# Altium PCB PCB.PcbDoc
Units mil, origin at the board's own origin, x right, y up, seen from the top; angles counter-clockwise.
Board outline 3149.61 x 860.63 mil, 4 copper layers (Top Layer 1, Top Layer, Bottom Layer, Bottom Layer 1), stack 33.356 mil thick; 3 components, 22 nets, 98 pads, 84 vias.
Unrouted connection lines stored in the file: 21.
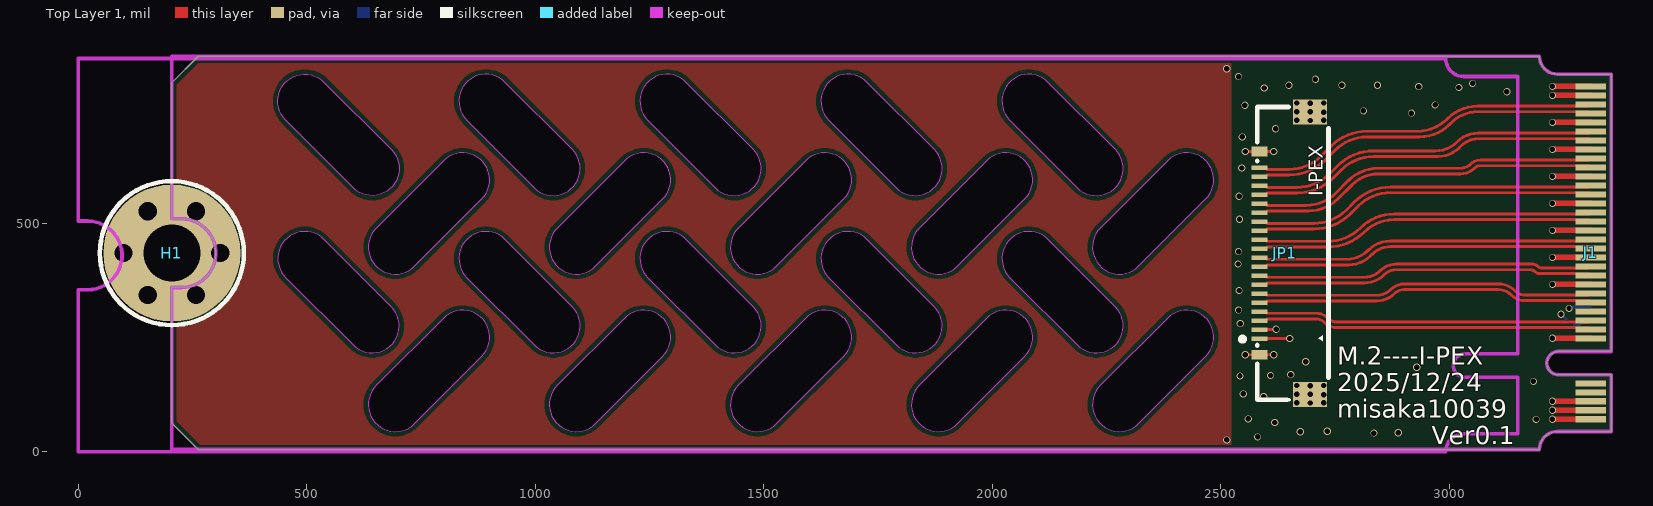
[diagram p0: Top Layer 1 view]
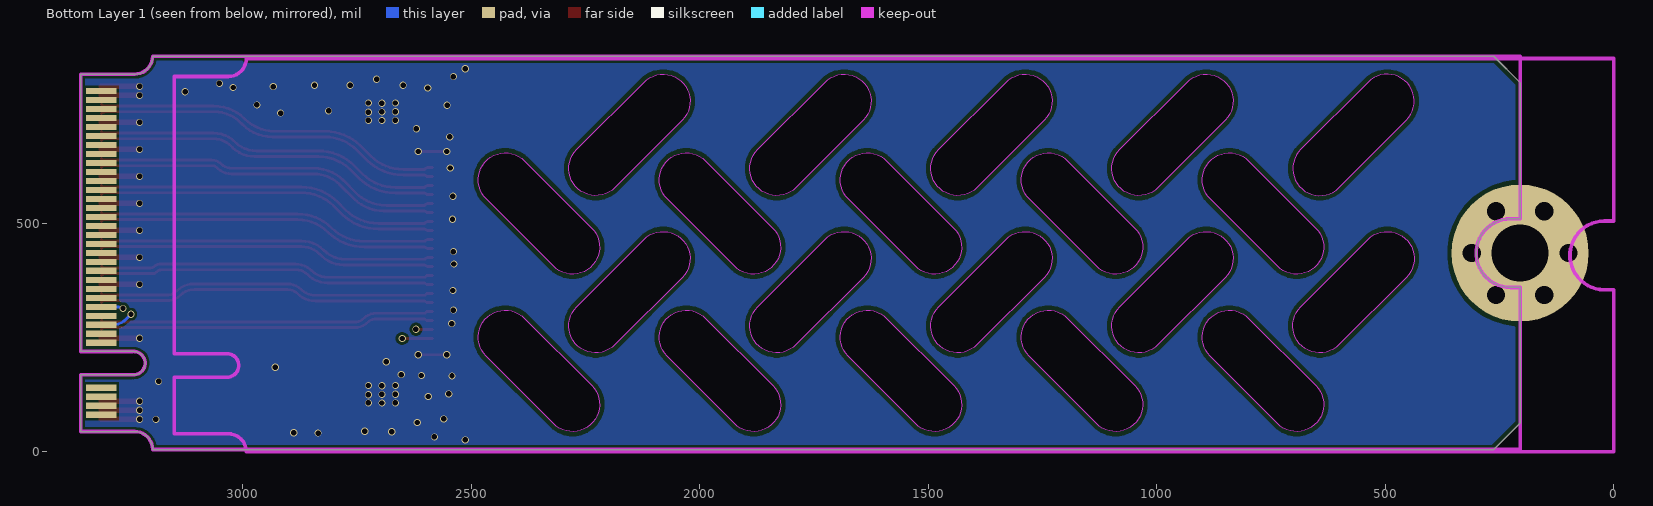
[diagram p1: Bottom Layer 1 view, seen from below]
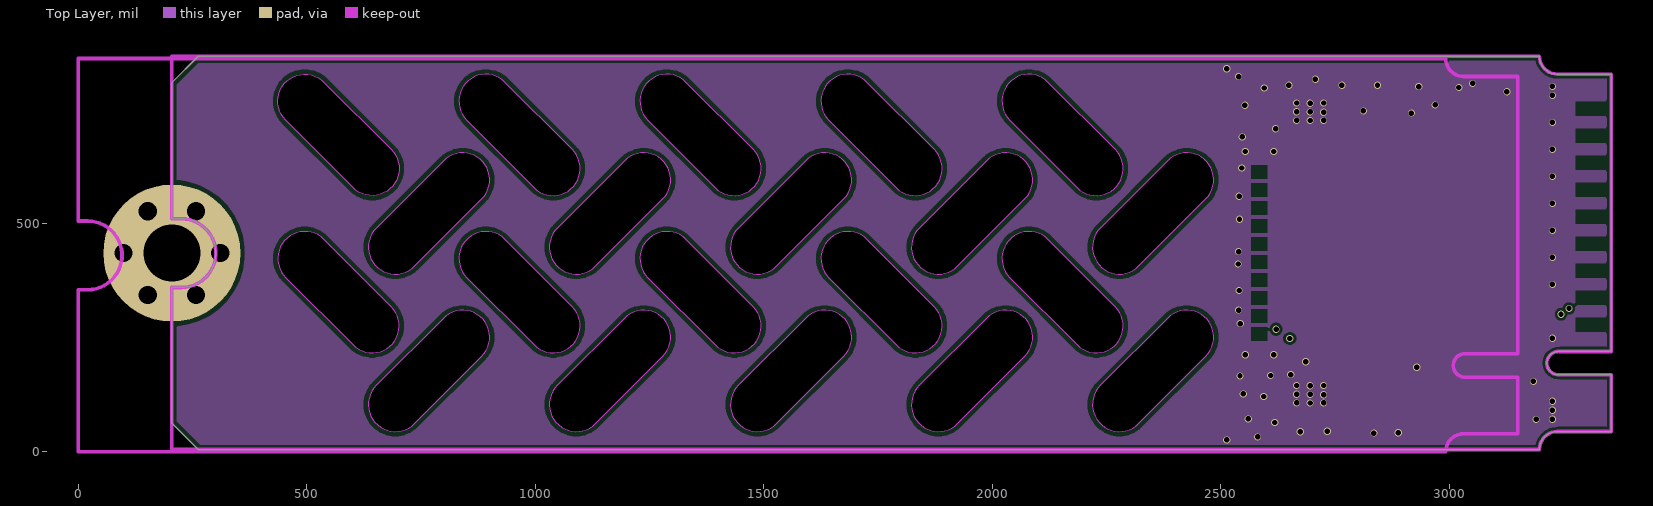
[diagram p2: Top Layer]
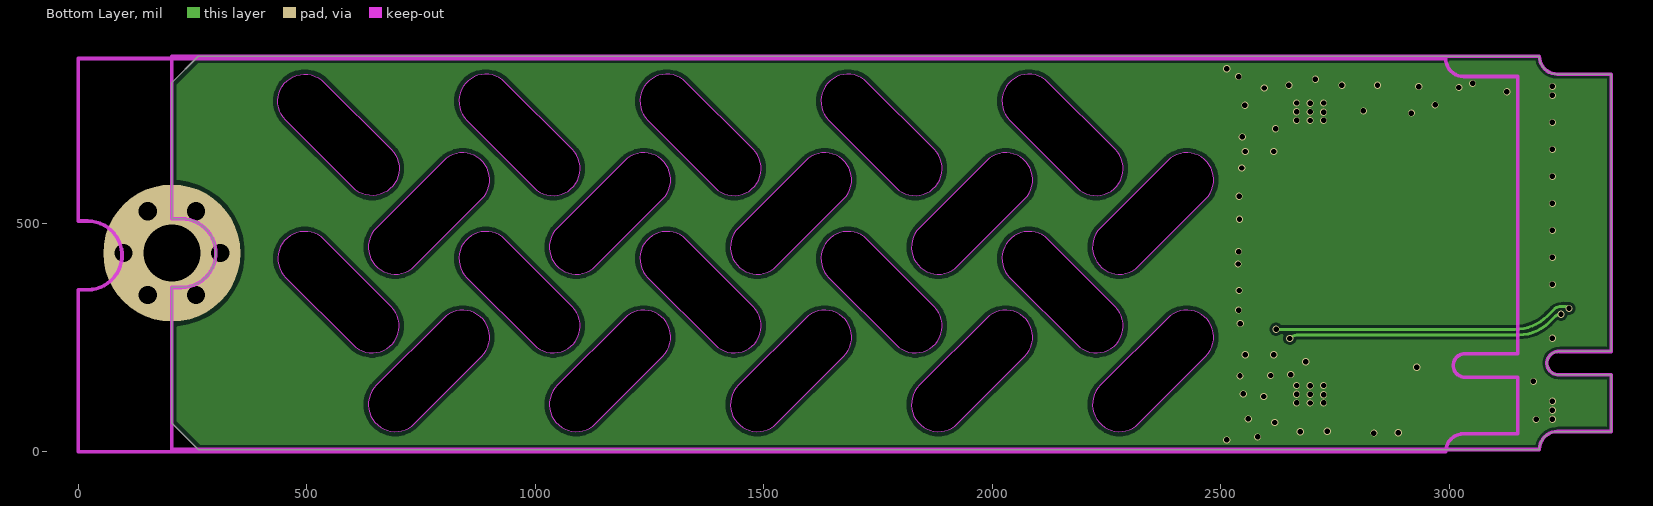
[diagram p3: Bottom Layer]

## Layer stack, top to bottom
Top Solder: solder mask 0.4, Solder Resist, Dk 3.5
Top Layer 1: signal copper 1.378
Dielectric 2: prepreg 2.8, PP-006, Dk 4.1
Top Layer: signal copper 0.689
Dielectric 1: dielectric 23.622, FR-4, Dk 4.8
Bottom Layer: signal copper 0.689
Dielectric 3: prepreg 2.8, PP-006, Dk 4.1
Bottom Layer 1: signal copper 1.378
Bottom Solder: solder mask 0.4, Solder Resist, Dk 3.5

## Board outline
205,359.57 225.9,359.57 ccw(c225.9,434.73) 225.9,509.9 225.9,509.94 205,509.94 205.01,509.91 205.01,807.73 262.91,865.63 3197.13,865.63 ccw(c3236.5,865.63) 3236.5,826.26 3354.61,826.25 3354.61,219.56 3240.44,219.56 ccw(c3239.21,193.97) 3240.43,168.38 3354.61,168.38 3354.61,44.37 3236.5,44.37 ccw(c3236.5,5) 3197.13,5 262.57,5 205.01,62.57
cut-out: 2038.42,725.45 2185.82,578.04 ccw(c2227.58,619.8) 2269.34,661.56 2121.94,808.96 ccw(c2080.18,767.2)
cut-out: 1642.36,725.45 1789.76,578.04 ccw(c1831.52,619.8) 1873.28,661.56 1725.87,808.96 ccw(c1684.12,767.2)
cut-out: 1246.29,725.45 1393.7,578.04 ccw(c1435.45,619.8) 1477.21,661.56 1329.81,808.96 ccw(c1288.05,767.2)
cut-out: 850.23,725.45 997.63,578.04 ccw(c1039.39,619.8) 1081.15,661.56 933.75,808.96 ccw(c891.99,767.2)
cut-out: 601.57,578.04 454.17,725.45 cw(c495.93,767.2) 537.68,808.96 685.09,661.56 cw(c643.33,619.8)
cut-out: 652.15,489.44 ccw(c693.91,447.68) 735.67,405.92 883.07,553.32 ccw(c841.31,595.08) 799.56,636.84
cut-out: 1048.22,489.44 ccw(c1089.98,447.68) 1131.73,405.92 1279.14,553.32 ccw(c1237.38,595.08) 1195.62,636.84
cut-out: 1444.28,489.44 ccw(c1486.04,447.68) 1527.8,405.92 1675.2,553.32 ccw(c1633.44,595.08) 1591.68,636.84
cut-out: 1840.34,489.44 ccw(c1882.1,447.68) 1923.86,405.92 2071.26,553.32 ccw(c2029.5,595.08) 1987.75,636.84
cut-out: 2236.41,489.44 ccw(c2278.16,447.68) 2319.92,405.92 2467.32,553.32 ccw(c2425.57,595.08) 2383.81,636.84
cut-out: 2038.42,381.19 2185.82,233.79 ccw(c2227.58,275.55) 2269.34,317.31 2121.94,464.71 ccw(c2080.18,422.95)
cut-out: 1642.36,381.19 1789.76,233.79 ccw(c1831.52,275.55) 1873.28,317.31 1725.87,464.71 ccw(c1684.12,422.95)
cut-out: 1246.29,381.19 1393.7,233.79 ccw(c1435.45,275.55) 1477.21,317.31 1329.81,464.71 ccw(c1288.05,422.95)
cut-out: 850.23,381.19 997.63,233.79 ccw(c1039.39,275.55) 1081.15,317.31 933.75,464.71 ccw(c891.99,422.95)
cut-out: 454.17,381.19 601.57,233.79 ccw(c643.33,275.55) 685.09,317.31 537.68,464.71 ccw(c495.93,422.95)
cut-out: 652.15,145.18 ccw(c693.91,103.43) 735.67,61.67 883.07,209.07 ccw(c841.31,250.83) 799.56,292.59
cut-out: 1048.22,145.18 ccw(c1089.98,103.43) 1131.73,61.67 1279.14,209.07 ccw(c1237.38,250.83) 1195.62,292.59
cut-out: 1444.28,145.18 ccw(c1486.04,103.43) 1527.8,61.67 1675.2,209.07 ccw(c1633.44,250.83) 1591.68,292.59
cut-out: 1840.34,145.18 ccw(c1882.1,103.43) 1923.86,61.67 2071.26,209.07 ccw(c2029.5,250.83) 1987.75,292.59
cut-out: 2236.41,145.18 ccw(c2278.16,103.43) 2319.92,61.67 2467.32,209.07 ccw(c2425.57,250.83) 2383.81,292.59

## Design rules (kind name [scope] priority, off if disabled: settings)
BoardOutlineClearance [All] p1: gap=10 ignorepadtopadclearanceinfootprint=FALSE except(0: Arc-SplitContinuation Track-SplitContinuation SMDPad-SplitContinuation THPad-SplitContinuation Via-SplitContinuation Fill-SplitContinuation Poly-SplitContinuation Region-SplitContinuation Text-SplitContinuation)
Clearance [All] p1: gap=6 ignorepadtopadclearanceinfootprint=FALSE
DiffPairsRouting "Schematic Differential Pairs Routing" [InNetClass('PICE')] p1: maxlimit=10 minlimit=6 mostfreqgap=6 toplayer_minwidth=6.3 toplayer_maxwidth=15 toplayer_prefwidth=6.3 midlayer1_minwidth=6.3 midlayer1_maxwidth=15 midlayer1_prefwidth=6.3 midlayer2_minwidth=6.3 midlayer2_maxwidth=15 midlayer2_prefwidth=6.3 bottomlayer_minwidth=6.3 bottomlayer_maxwidth=15 bottomlayer_prefwidth=6.3 maxuncoupledlength=500
DiffPairsRouting [All] p2: maxlimit=10 minlimit=4 mostfreqgap=10 toplayer_minwidth=4 toplayer_maxwidth=15 toplayer_prefwidth=15 midlayer1_minwidth=4 midlayer1_maxwidth=15 midlayer1_prefwidth=15 midlayer2_minwidth=4 midlayer2_maxwidth=15 midlayer2_prefwidth=15 bottomlayer_minwidth=4 bottomlayer_maxwidth=15 bottomlayer_prefwidth=15 maxuncoupledlength=500
PolygonConnect [All] p1: thpad.connectstyle=Relief thpad.reliefconductorwidth=10 thpad.reliefentries=4 thpad.polygonreliefangle="90 Angle" thpad.airgapwidth=10 smdpad.connectstyle=Relief smdpad.reliefconductorwidth=10 smdpad.reliefentries=4 smdpad.polygonreliefangle="90 Angle" smdpad.airgapwidth=10 via.connectstyle=Direct via.reliefconductorwidth=10 via.reliefentries=4 via.polygonreliefangle="90 Angle" via.airgapwidth=10
RoutingVias [All] p1: holewidth=11.81 width=0 viastyle="Through Hole" minholewidth=11.81 minwidth=15.75 maxholewidth=28 maxwidth=50
SolderMaskExpansion [ISVIA] p1: expansion=4 istentingtop=TRUE
Width [All] p1: maxlimit=400 minlimit=4 preferedwidth=10
29 further rules are at their usual default settings.

## Classes and differential pairs
net class PICE: REFCLK_N REFCLK_P RX0_N RX0_P RX1_N RX1_P RX2_N RX2_P RX3_N RX3_P TX0_N TX0_P TX1_N TX1_P TX2_N TX2_P TX3_N TX3_P
differential pair TX3: +TX3_P -TX3_N
differential pair TX2: +TX2_P -TX2_N
differential pair TX1: +TX1_P -TX1_N
differential pair TX0: +TX0_P -TX0_N
differential pair RX3: +RX3_P -RX3_N
differential pair RX2: +RX2_P -RX2_N
differential pair RX1: +RX1_P -RX1_N
differential pair RX0: +RX0_P -RX0_N
differential pair REFCLK: +REFCLK_P -REFCLK_N

## Components (designator, comment, footprint, x,y, rotation, side; value= is the part's Value field where it differs from the comment)
H1 "Hole" M3x4+6_N 205,434.75 r0 top
J1 "M.2接口" "M.2 M KEY PcbEdge" 3354.61,435.31 r0 top
JP1 "FPC1.0-24P" CONN-SMD_20P-P0.50_I-PEX_20455-020E-02 2640,434.73 r90 top

## Footprints (in the part's own frame and the unit in brackets; to place one, negate y for a bottom-side part, rotate by r counter-clockwise, add the part's x,y. Pads: shape width x height; smd on the part's side, far side on the other; paste and mask are expansions set on the pad)
CONN-SMD_20P-P0.50_I-PEX_20455-020E-02 [mm]
  rect 0.25x0.9 smd: 1(-4.75,1.41) 2(-4.25,1.41) 3(-3.75,1.41) 4(-3.25,1.41) 5(-2.75,1.41) 6(-2.25,1.41) 7(-1.75,1.41) 8(-1.25,1.41) 9(-0.75,1.41) 10(-0.25,1.41) 11(0.25,1.41) 12(0.75,1.41) 13(1.25,1.41) 14(1.75,1.41) 15(2.25,1.41) 16(2.75,1.41) 17(3.25,1.41) 18(3.75,1.41) 19(4.25,1.41) 20(4.75,1.41)
  rect 0.55x0.9 smd: 21(5.65,1.41) 23(-5.65,1.41)
  rect 1.4x1.9 smd: 22(7.85,-1.41) 24(-7.85,-1.41)
  silkscreen extent -8.14,-2.43 8.12,2.48, body extent -8.13,-2.4 8.13,1.55, height 1.01
M3x4+6_N [mil] "M3铜柱，长：4mm，螺纹长：6mm"
  round 40 hole 40: 1(-106,0) 1(-53,-91.8) 1(-53,91.8) 1(53,-91.8) 1(53,91.8) 1(106,0)
  round 300 hole 125: 1(0,0)
  silkscreen extent -157,-157 157,157, body extent -106,-93 106,93, height 159
"M.2 M KEY PcbEdge" [mm] "m.2 mkey金手指"
  rect 1.7x0.34 smd paste+0 mask+0.102: 1(-1.15,9.25) 3(-1.15,8.75) 5(-1.15,8.249) 7(-1.15,7.749) 9(-1.15,7.249) 11(-1.15,6.749) 13(-1.15,6.249) 15(-1.15,5.749) 17(-1.15,5.249) 19(-1.15,4.749) 21(-1.15,4.249) 23(-1.15,3.749) 25(-1.15,3.249) 27(-1.15,2.749) 29(-1.15,2.249) 31(-1.15,1.749) 33(-1.15,1.249) 35(-1.15,0.749) 37(-1.15,0.249) 39(-1.15,-0.251) 41(-1.15,-0.751) 43(-1.15,-1.251) 45(-1.15,-1.751) 47(-1.15,-2.251) 49(-1.15,-2.751) 51(-1.15,-3.251) 53(-1.15,-3.751) 55(-1.15,-4.251) 57(-1.15,-4.751) 67(-1.15,-7.251) 69(-1.15,-7.751) 71(-1.15,-8.251) 73(-1.15,-8.751) 75(-1.15,-9.251)
  rect 1.7x0.34 smd far side paste+0 mask+0.102: 2(-1.15,9) 4(-1.15,8.501) 6(-1.15,8.001) 8(-1.15,7.501) 10(-1.15,7.001) 12(-1.15,6.501) 14(-1.15,6.001) 16(-1.15,5.501) 18(-1.15,5.001) 20(-1.151,4.499) 22(-1.15,4.001) 24(-1.15,3.501) 26(-1.15,3.001) 28(-1.15,2.501) 30(-1.15,2.001) 32(-1.15,1.501) 34(-1.15,1.001) 36(-1.15,0.501) 38(-1.15,0.001) 40(-1.15,-0.499) 42(-1.151,-0.998) 44(-1.15,-1.499) 46(-1.15,-1.999) 48(-1.15,-2.499) 50(-1.15,-2.999) 52(-1.15,-3.499) 54(-1.15,-3.999) 56(-1.15,-4.499) 58(-1.15,-4.999) 68(-1.15,-7.499) 70(-1.15,-7.999) 72(-1.15,-8.499) 74(-1.15,-8.999)
  Keep-Out Layer lines w0.2: -80,-1.924 -79.469,-1.924 ccw(c-79.469,-0.015) -79.469,1.894 ; -80,-1.923 -80,-10.93 -4,-10.93 cw(c-3,-10.93) -3,-9.93 0,-9.93 0,-6.78 -2.9,-6.78 cw(c-2.931,-6.13) -2.9,-5.48 0,-5.48 0,9.93 -3,9.93 cw(c-3,10.93) -4,10.93 -80,10.93 ; -80,1.895 -80,10.93 ; -80,1.895 -79.469,1.895

## Part data
H1: "铜柱孔", BOM名称=铜柱孔, 学习资源=www.ooocke.com, 版权归属=源创客
J1: Package=None, Availability=Unavailable, MF="Amphenol ICC (FCI)", MP=MDT420M01002, Price=None
JP1: library part FPC-24P, "FPC连接器", BOM名称=FPC连接器, 学习资源=www.ooocke.com, 版权归属=源创客

## Via types
v1: diameter 15.75, hole 11.81, Top Layer 1 to Bottom Layer 1, tented both sides, 84 vias

## Nets (pads, with @x,y where several pads share a name; then routed paths per layer and width w, separated by ;. In a path a pad name is that pad's centre, name@x,y a point inside that pad or via, vN(x,y) a via of type N, cw(c..) or ccw(c..) an arc to the next point about the centre after c; other vN are vias at no path point)
GND: H1.1@205,434.75 J1.1 J1.3 J1.9 J1.15 J1.21 J1.27 J1.33 J1.39 J1.45 J1.51 J1.57 J1.71 J1.73 J1.75 JP1.21 JP1.22 JP1.23 JP1.24 | length 1213.9
  Top Layer 1 w6.3: v1(2553.52,212.29) JP1.23 v1(2615.71,212.29) ; v1(2553.52,657.17) JP1.21 v1(2615.71,657.17)
  Top Layer 1 w11.81: v1(3225.52,71.11) J1.75 ; v1(3225.52,90.79) J1.73 ; v1(3225.52,110.48) J1.71 ; v1(3225.52,248.27) J1.57 ; v1(3225.52,366.38) J1.45 ; v1(3225.52,425.44) J1.39 ; v1(3225.52,484.49) J1.33 ; v1(3225.52,543.55) J1.27 ; v1(3225.52,602.6) J1.21 ; v1(3225.52,661.66) J1.15 ; v1(3225.52,720.71) J1.9 ; v1(3225.52,779.78) J1.3 ; v1(3225.53,799.48) J1.1
  other v1: 2513,26 2580.54,32.51 2835,41 2888.16,41.83 2674,44 2733,45 2618,64 3190,71 2560,72 2666,107 2695.51,106.68 2725,107 2594,121 2725,125 2666,126 2695.51,125.68 2549.09,126.65 2666,145 2695.51,144.68 2725,145 3184,154 2542,166 2609,167 2653,169 2929,185 2686,197 2542.72,280.4 2539,310 258,342.95 2540,353 2538,411 311,434.75 2539,438 2541,509 258,526.55 2540,559 2546,621 2547,689 2620,707 2666,725.11 2695.51,724.79 2725,725.11 2917,741 2725,743.11 2666,744.11 2695.51,743.79 2812,746 2552.81,758.3 2969,759 2666,763.11 2695.51,762.79 2725,763.11 3126,788 2595,796 3021,797 2933,799 2649,802 2765,802 2843,802 3051,806 2707,815 2539,821 2513,838
PERST#: J1.50 JP1.2 | length 733.2
  Top Layer 1 w6.3: JP1.2 2584.8,267.7 2620.7,267.7 v1(2621,268)
  Bottom Layer w6.3: v1(2621,268) 3143.96,268 ccw(c3143.96,368) 3214.67,297.29 3228.85,311.46 cw(c3245.25,295.06) 3245.25,318.26 3250.95,318.26 cw(c3250.95,302.64) 3255.55,317.56 cw(c3250.95,302.64) v1(3261.99,313.69)
  Bottom Layer 1 w6.3: 3270.56,317.23 J1.50
REFCLK_N: J1.53 JP1.4 | length 733
  Top Layer 1 w6.3: JP1.4 2597.3,306.78 2600.99,303.09 2708.33,303.09 cw(c2708.33,264.53) 2735.6,291.79 ccw(c2754.52,310.72) 2754.52,283.95 3275.32,283.95 3275.47,284.1 3305.78,284.1 J1.53
REFCLK_P: J1.55 JP1.3 | length 733
  Top Layer 1 w6.3: JP1.3 2597.3,287.1 2600.99,290.79 2708.22,290.79 cw(c2708.22,264.27) 2726.97,283.02 ccw(c2754.42,310.47) 2754.42,271.65 3275.32,271.65 3275.47,271.51 3305.78,271.51 J1.55
RX0_N: J1.41 JP1.8 | length 737.3
  Top Layer 1 w6.3: JP1.8 2597.3,385.52 2600.99,381.83 2814.08,381.83 ccw(c2814.08,430.95) 2848.8,396.19 ; 2848.84,396.24 cw(c2883.56,361.48) 2883.56,410.6 3182.59,410.6 cw(c3182.59,396.03) 3192.9,406.33 ccw(c3203.21,416.64) 3203.21,402.06 3275.32,402.06 3275.47,402.21 3300.77,402.21 ccw(c3300.77,414.31) J1.41
RX0_P: J1.43 JP1.7 | length 737.3
  Top Layer 1 w6.3: JP1.7 2597.3,365.84 2600.99,369.53 2814.19,369.53 ccw(c2814.19,430.68) 2857.44,387.44 cw(c2883.67,361.21) 2883.67,398.3 3177.5,398.3 cw(c3177.5,383.73) 3187.8,394.03 ccw(c3198.11,404.34) 3198.11,389.76 3275.32,389.76 3275.47,389.62 3300.77,389.62 cw(c3300.77,377.52) J1.43
RX1_N: J1.29 JP1.12 | length 748.5
  Top Layer 1 w6.3: JP1.12 2594.69,464.26 cw(c2594.69,457.96) JP1.12@2599.13,462.42 ; J1.29 3305.78,520.32 3275.47,520.32 3275.32,520.17 2878.65,520.17 ccw(c2878.65,416.66) 2805.47,489.87 cw(c2734.75,560.57) 2734.75,460.57 2603.59,460.57 ; JP1.12@2599.15,462.4 ccw(c2603.59,466.87) 2603.59,460.57 ; JP1.12@2599.15,462.4 2600.99,460.57 2603.59,460.57
RX1_P: J1.31 JP1.11 | length 748.5
  Top Layer 1 w6.3: JP1.11 2594.69,444.58 ccw(c2594.69,450.88) JP1.11@2599.13,446.41 ; J1.31 3305.78,507.73 3275.47,507.73 3275.32,507.87 2878.77,507.87 ccw(c2878.77,416.39) 2814.11,481.11 cw(c2734.87,560.29) 2734.87,448.27 2603.59,448.27 ; 2603.59,448.27 ccw(c2603.59,441.97) 2599.15,446.43 2600.99,448.27 2603.59,448.27
RX2_N: J1.17 JP1.16 | length 763
  Top Layer 1 w6.3: JP1.16 2594.69,543 cw(c2594.69,536.7) JP1.16@2599.13,541.16 ; 2778.9,593.29 2751.9,566.3 cw(c2686.74,631.47) 2686.74,539.31 2603.59,539.31 ; 2778.93,593.32 cw(c2844.1,528.09) 2844.1,620.3 3024.58,620.3 ccw(c3024.58,651) 3046.28,629.28 cw(c3068,607.58) 3068,638.28 3275.32,638.28 3275.47,638.43 3305.78,638.43 J1.17 ; JP1.16@2599.15,541.14 ccw(c2603.59,545.61) 2603.59,539.31 ; JP1.16@2599.15,541.14 2600.99,539.31 2603.59,539.31
RX2_P: J1.19 JP1.15 | length 763.5
  Top Layer 1 w6.3: JP1.15 2594.69,523.32 ccw(c2594.69,529.62) JP1.15@2599.13,525.15 ; J1.19 3305.78,625.84 3275.47,625.84 3275.32,625.98 3068.09,625.98 ccw(c3068.09,607.37) 3054.94,620.54 cw(c3024.67,650.78) 3024.67,608 2844.23,608 ccw(c2844.23,527.77) 2787.52,584.52 2757,554 cw(c2691.83,619.17) 2691.83,527.01 2603.59,527.01 ; JP1.15@2599.15,525.17 cw(c2603.59,520.71) 2603.59,527.01 ; JP1.15@2599.15,525.17 2600.99,527.01 2603.59,527.01
RX3_N: J1.7 JP1.19 | length 772.6
  Top Layer 1 w6.3: JP1.19 2594.69,602.06 ccw(c2594.69,608.36) JP1.19@2599.13,603.89 ; J1.7 ccw(c3300.77,731.85) 3300.77,743.95 3275.47,743.95 3275.32,744.09 3062.51,744.09 ccw(c3062.51,662.34) 3004.7,720.15 3001.1,716.55 cw(c2934.6,783.05) 3001.06,716.51 cw(c2934.6,783.05) 2934.6,689 2820.42,689 ccw(c2820.42,589) 2749.71,659.71 2728.56,638.56 cw(c2649.35,717.77) 2649.35,605.75 2603.59,605.75 ; JP1.19@2599.15,603.91 cw(c2603.59,599.45) 2603.59,605.75 ; JP1.19@2599.15,603.91 2600.99,605.75 2603.59,605.75
RX3_P: J1.5 JP1.20 | length 772.1
  Top Layer 1 w6.3: JP1.20 2594.69,621.74 cw(c2594.69,615.44) JP1.20@2599.13,619.9 ; 2996.01,728.85 cw(c2929.5,795.35) 2995.97,728.81 cw(c2929.5,795.35) 2929.5,701.3 2820.31,701.3 ccw(c2820.31,589.28) 2741.11,668.51 2719.94,647.34 cw(c2649.23,718.05) 2649.23,618.05 2603.59,618.05 ; 2996.03,728.87 cw(c3062.48,662.43) 2996.09,728.94 cw(c3062.48,662.43) 3062.48,756.39 3275.32,756.39 3275.47,756.54 3300.77,756.54 ccw(c3300.77,768.64) J1.5 ; JP1.20@2599.15,619.88 ccw(c2603.59,624.35) 2603.59,618.05 ; JP1.20@2599.15,619.88 2600.99,618.05 2603.59,618.05
TX0_N: J1.47 JP1.6 | length 741
  Top Layer 1 w6.3: JP1.6 2597.3,346.15 2600.99,342.46 2841.5,342.46 ccw(c2841.5,384.87) 2871.48,354.88 cw(c2901.47,324.89) 2901.47,367.3 3106.87,367.3 cw(c3106.87,313.64) 3144.8,351.6 ccw(c3165.51,372.28) 3165.51,343.01 3275.32,343.01 3275.47,343.16 3305.78,343.16 J1.47
TX0_P: J1.49 JP1.5 | length 741
  Top Layer 1 w6.3: JP1.5 2597.3,326.47 2600.99,330.16 2841.53,330.16 ccw(c2841.53,384.78) 2880.16,346.16 cw(c2901.51,324.81) 2901.51,355 3106.82,355 cw(c3106.82,313.53) 3136.15,342.85 ; 3136.18,342.82 ccw(c3165.46,372.15) 3165.46,330.71 3275.32,330.71 3275.47,330.56 3305.78,330.56 J1.49
TX1_N: J1.35 JP1.10 | length 743.2
  Top Layer 1 w6.3: JP1.10 2594.69,424.89 cw(c2594.69,418.59) JP1.10@2599.13,423.05 ; 2822.74,441.14 cw(c2774.57,489.35) 2774.57,421.2 2603.59,421.2 ; 2822.79,441.18 cw(c2870.92,393.05) 2822.84,441.23 cw(c2870.92,393.05) 2870.92,461.12 3275.32,461.12 3275.47,461.27 3305.78,461.27 J1.35 ; JP1.10@2599.15,423.03 ccw(c2603.59,427.5) 2603.59,421.2 ; JP1.10@2599.15,423.03 2600.99,421.2 2603.59,421.2
TX1_P: J1.37 JP1.9 | length 743.8
  Top Layer 1 w6.3: JP1.9 2594.69,405.21 ccw(c2594.69,411.51) JP1.9@2599.13,407.04 ; J1.37 3305.78,448.67 3275.47,448.67 3275.32,448.82 2870.95,448.82 ccw(c2870.95,392.97) 2831.46,432.46 2827.86,428.86 cw(c2779.67,477.05) 2779.67,408.9 2603.59,408.9 ; JP1.9@2599.15,407.06 cw(c2603.59,402.6) 2603.59,408.9 ; JP1.9@2599.15,407.06 2600.99,408.9 2603.59,408.9
TX2_N: J1.23 JP1.14 | length 756.3
  Top Layer 1 w6.3: JP1.14 2594.69,503.63 cw(c2594.69,497.33) JP1.14@2599.13,501.79 ; 2792.02,546.42 2774.83,529.23 cw(c2704.12,599.94) 2704.12,499.94 2603.59,499.94 ; 2792.04,546.44 cw(c2871.24,467.21) 2871.24,579.23 3275.32,579.23 3275.47,579.38 3305.78,579.38 J1.23 ; 2603.59,499.94 cw(c2603.59,506.24) 2599.15,501.77 2600.99,499.94 2603.59,499.94
TX2_P: J1.25 JP1.13 | length 756.3
  Top Layer 1 w6.3: JP1.13 2594.69,483.95 ccw(c2594.69,490.25) JP1.13@2599.13,485.78 ; J1.25 3305.78,566.78 3275.47,566.78 3275.32,566.93 2871.35,566.93 ccw(c2871.35,466.93) 2800.64,537.64 2783.45,520.45 cw(c2704.24,599.66) 2704.24,487.64 2603.59,487.64 ; JP1.13@2599.15,485.8 cw(c2603.59,481.34) 2603.59,487.64 ; JP1.13@2599.15,485.8 2600.99,487.64 2603.59,487.64
TX3_N: J1.11 JP1.18 | length 766.8
  Top Layer 1 w6.3: JP1.18 2594.69,582.37 cw(c2594.69,576.07) JP1.18@2599.13,580.53 ; 3016.82,677.82 cw(c2969.7,724.94) 2969.7,658.3 2834.31,658.3 ccw(c2834.31,546.28) 2755.11,625.51 2737.57,607.97 cw(c2666.86,678.68) 2666.86,578.68 2603.59,578.68 ; 3016.84,677.84 cw(c3063.91,630.78) 3016.89,677.89 cw(c3063.91,630.78) 3063.91,697.34 3275.32,697.34 3275.47,697.49 3305.78,697.49 J1.11 ; 2603.59,578.68 cw(c2603.59,584.98) 2599.15,580.51 2600.99,578.68 2603.59,578.68
TX3_P: J1.13 JP1.17 | length 767.4
  Top Layer 1 w6.3: JP1.17 2594.69,562.69 ccw(c2594.69,568.99) JP1.17@2599.13,564.52 ; J1.13 3305.78,684.89 3275.47,684.89 3275.32,685.04 3063.94,685.04 ccw(c3063.94,630.7) 3025.52,669.12 3021.91,665.52 cw(c2974.79,712.64) 2974.79,646 2834.42,646 ccw(c2834.42,546) 2763.71,616.71 2746.19,599.19 cw(c2666.98,678.4) 2666.98,566.38 2603.59,566.38 ; 2603.59,566.38 ccw(c2603.59,560.08) 2599.15,564.54 2600.99,566.38 2603.59,566.38
VCC3.3V: J1.2 J1.4 J1.12 J1.14 J1.16 J1.18 J1.70 J1.72 J1.74
WAKE#: J1.54 JP1.1 | length 724
  Top Layer 1 w6.3: JP1.1 2584.64,247.86 2650.86,247.86 v1(2651,248)
  Bottom Layer w6.3: v1(2651,248) cw(c2669.59,229.41) 2654.98,251.27 cw(c2669.59,229.41) 2669.59,255.7 3151.94,255.7 ccw(c3151.94,349.26) 3218.06,283.06 ccw(c3151.94,349.26) 3218.1,283.1 3230.07,295.07 ; 3230.08,295.08 cw(c3244.34,280.8) 3236.07,299.21 cw(c3244.34,280.8) v1(3244.34,300.98)
  Bottom Layer 1 w6.3: v1(3244.34,300.98) 3255.24,290.07 ccw(c3284.72,319.55) J1.54@3284.72,277.86
pads on no net: H1.1@99,434.75 H1.1@152,342.95 H1.1@152,526.55 H1.1@258,342.95 H1.1@258,526.55 H1.1@311,434.75 J1.6 J1.8 J1.10 J1.20 J1.22 J1.24 J1.26 J1.28 J1.30 J1.32 J1.34 J1.36 J1.38 J1.40 J1.42 J1.44 J1.46 J1.48 J1.52 J1.56 J1.58 J1.67 J1.68 J1.69

## Polygon pours and split planes (outlines as drawn)
GND on Top Layer "GND_L02_P000" (solid, remove dead copper, pour order 0): 205,359.57 225.9,359.57 ccw(c225.9,434.73) 225.9,509.9 225.9,509.94 205,509.94 205.01,509.91 205.01,807.73 262.91,865.63 3197.13,865.63 ccw(c3236.5,865.63) 3236.5,826.26 3354.61,826.25 3354.61,219.56 3240.44,219.56 ccw(c3239.21,193.97) 3240.43,168.38 3354.61,168.38 3354.61,44.37 3236.5,44.37 ccw(c3236.5,5) 3197.13,5 262.57,5 205.01,62.57
GND on Top Layer 1 "GND_L01_P003" (solid, remove dead copper, pour order 3): 205,359.57 225.9,359.57 ccw(c225.9,434.73) 225.9,509.9 225.9,509.94 205,509.94 205.01,509.91 205.01,807.73 262.91,865.63 3197.13,865.63 ccw(c3236.5,865.63) 3236.5,826.26 3354.61,826.25 3354.61,219.56 3240.44,219.56 ccw(c3239.21,193.97) 3240.43,168.38 3354.61,168.38 3354.61,44.37 3236.5,44.37 ccw(c3236.5,5) 3197.13,5 262.57,5 205.01,62.57
GND on Bottom Layer 1 "GND_L04_P001" (solid, remove dead copper, pour order 1): 205,359.57 225.9,359.57 ccw(c225.9,434.73) 225.9,509.9 225.9,509.94 205,509.94 205.01,509.91 205.01,807.73 262.91,865.63 3197.13,865.63 ccw(c3236.5,865.63) 3236.5,826.26 3354.61,826.25 3354.61,219.56 3240.44,219.56 ccw(c3239.21,193.97) 3240.43,168.38 3354.61,168.38 3354.61,44.37 3236.5,44.37 ccw(c3236.5,5) 3197.13,5 262.57,5 205.01,62.57
GND on Bottom Layer "GND_L03_P002" (solid, remove dead copper, pour order 2): 205,359.57 225.9,359.57 ccw(c225.9,434.73) 225.9,509.9 225.9,509.94 205,509.94 205.01,509.91 205.01,807.73 262.91,865.63 3197.13,865.63 ccw(c3236.5,865.63) 3236.5,826.26 3354.61,826.25 3354.61,219.56 3240.44,219.56 ccw(c3239.21,193.97) 3240.43,168.38 3354.61,168.38 3354.61,44.37 3236.5,44.37 ccw(c3236.5,5) 3197.13,5 262.57,5 205.01,62.57

## Keep-outs
Keep-Out Layer:
  lines w7.87: 0,354.57 20.9,354.57 ccw(c20.9,429.73) 20.9,504.9 ; 0.01,354.61 0.01,0.01 2992.13,0 cw(c3031.5,0) 3031.5,39.37 3149.61,39.37 3149.61,163.38 3035.44,163.38 cw(c3034.2,188.98) 3035.43,214.57 3149.61,214.56 3149.61,821.25 3031.5,821.25 cw(c3031.5,860.63) 2992.13,860.63 0,860.63 ; 0.01,504.91 0.01,860.61 ; 0,504.94 20.9,504.94

## Other copper
Top Layer 1:
  pour cut-out: 3360,865.63 2523,865.63 2523,5 3360,5
Top Layer:
  pour cut-out: 3342.74,294.34 3342.79,294.34 3342.79,261.27 3275.86,261.27 3275.86,294.34 3341.2,294.34
  pour cut-out: 3342.74,353.4 3342.79,353.4 3342.79,320.33 3275.86,320.33 3275.86,353.4 3341.2,353.4
  pour cut-out: 3342.74,412.45 3342.79,412.45 3342.79,379.38 3275.86,379.38 3275.86,412.45 3341.2,412.45
  pour cut-out: 3342.74,471.51 3342.79,471.51 3342.79,438.44 3275.86,438.44 3275.86,471.51 3341.2,471.51
  pour cut-out: 3342.74,530.56 3342.79,530.56 3342.79,497.49 3275.86,497.49 3275.86,530.56 3341.2,530.56
  pour cut-out: 3342.74,589.62 3342.79,589.62 3342.79,556.55 3275.86,556.55 3275.86,589.62 3341.2,589.62
  pour cut-out: 3342.74,648.67 3342.79,648.67 3342.79,615.6 3275.86,615.6 3275.86,648.67 3341.2,648.67
  pour cut-out: 3342.74,707.73 3342.79,707.73 3342.79,674.66 3275.86,674.66 3275.86,707.73 3341.2,707.73
  pour cut-out: 3342.74,766.78 3342.79,766.78 3342.79,733.71 3275.86,733.71 3275.86,766.78 3341.2,766.78
  pour cut-out: 2566.78,272.18 2566.78,242.81 2602.22,242.81 2602.22,272.33
  pour cut-out: 2566.78,311.55 2566.78,282.18 2602.22,282.18 2602.22,311.7
  pour cut-out: 2566.78,350.92 2566.78,321.55 2602.22,321.55 2602.22,351.07
  pour cut-out: 2566.78,390.29 2566.78,360.92 2602.22,360.92 2602.22,390.44
  pour cut-out: 2566.78,429.66 2566.78,400.29 2602.22,400.29 2602.22,429.81
  pour cut-out: 2566.78,469.03 2566.78,439.66 2602.22,439.66 2602.22,469.18
  pour cut-out: 2566.78,508.4 2566.78,479.03 2602.22,479.03 2602.22,508.55
  pour cut-out: 2566.78,547.77 2566.78,518.4 2602.22,518.4 2602.22,547.92
  pour cut-out: 2566.78,587.14 2566.78,557.77 2602.22,557.77 2602.22,587.29
  pour cut-out: 2566.78,626.51 2566.78,597.14 2602.22,597.14 2602.22,626.66

## Silkscreen, mask and mechanical layers (free items; w line width, h text height)
Top Overlay:
  text "M.2----I-PEX" at 2755,191 h40
  text "2025/12/24" at 2755,132.67 h40
  text "misaka10039" at 2755,74.33 h40
  text "Ver0.1" at 2961.6,16 h40
Mechanical 1:
  lines w0.5: 454.17,381.19 cw(c495.93,422.95) 537.68,464.71 685.09,317.31 cw(c643.33,275.55) 601.57,233.79 454.17,381.19 ; 454.17,725.45 cw(c495.93,767.2) 537.68,808.96 685.09,661.56 cw(c643.33,619.8) 601.57,578.04 454.17,725.45 ; 652.15,145.18 ccw(c693.91,103.43) 735.67,61.67 883.07,209.07 ccw(c841.31,250.83) 799.56,292.59 652.15,145.18 ; 652.15,489.44 ccw(c693.91,447.68) 735.67,405.92 883.07,553.32 ccw(c841.31,595.08) 799.56,636.84 652.15,489.44 ; 850.23,381.19 cw(c891.99,422.95) 933.75,464.71 1081.15,317.31 cw(c1039.39,275.55) 997.63,233.79 850.23,381.19 ; 850.23,725.45 cw(c891.99,767.2) 933.75,808.96 1081.15,661.56 cw(c1039.39,619.8) 997.63,578.04 850.23,725.45 ; 1048.22,145.18 ccw(c1089.98,103.43) 1131.73,61.67 1279.14,209.07 ccw(c1237.38,250.83) 1195.62,292.59 1048.22,145.18 ; 1048.22,489.44 ccw(c1089.98,447.68) 1131.73,405.92 1279.14,553.32 ccw(c1237.38,595.08) 1195.62,636.84 1048.22,489.44 ; 1246.29,381.19 cw(c1288.05,422.95) 1329.81,464.71 1477.21,317.31 cw(c1435.45,275.55) 1393.7,233.79 1246.29,381.19 ; 1246.29,725.45 cw(c1288.05,767.2) 1329.81,808.96 1477.21,661.56 cw(c1435.45,619.8) 1393.7,578.04 1246.29,725.45 ; 1444.28,145.18 ccw(c1486.04,103.43) 1527.8,61.67 1675.2,209.07 ccw(c1633.44,250.83) 1591.68,292.59 1444.28,145.18 ; 1444.28,489.44 ccw(c1486.04,447.68) 1527.8,405.92 1675.2,553.32 ccw(c1633.44,595.08) 1591.68,636.84 1444.28,489.44 ; 1642.36,381.19 cw(c1684.12,422.95) 1725.87,464.71 1873.28,317.31 cw(c1831.52,275.55) 1789.76,233.79 1642.36,381.19 ; 1642.36,725.45 cw(c1684.12,767.2) 1725.87,808.96 1873.28,661.56 cw(c1831.52,619.8) 1789.76,578.04 1642.36,725.45 ; 1840.34,145.18 ccw(c1882.1,103.43) 1923.86,61.67 2071.26,209.07 ccw(c2029.5,250.83) 1987.75,292.59 1840.34,145.18 ; 1840.34,489.44 ccw(c1882.1,447.68) 1923.86,405.92 2071.26,553.32 ccw(c2029.5,595.08) 1987.75,636.84 1840.34,489.44 ; 2038.42,381.19 cw(c2080.18,422.95) 2121.94,464.71 2269.34,317.31 cw(c2227.58,275.55) 2185.82,233.79 2038.42,381.19 ; 2038.42,725.45 cw(c2080.18,767.2) 2121.94,808.96 2269.34,661.56 cw(c2227.58,619.8) 2185.82,578.04 2038.42,725.45 ; 2236.41,145.18 ccw(c2278.16,103.43) 2319.92,61.67 2467.32,209.07 ccw(c2425.57,250.83) 2383.81,292.59 2236.41,145.18 ; 2236.41,489.44 ccw(c2278.16,447.68) 2319.92,405.92 2467.32,553.32 ccw(c2425.57,595.08) 2383.81,636.84 2236.41,489.44
  lines w7.87: 205,359.57 225.9,359.57 ccw(c225.9,434.73) 225.9,509.9 ; 205.01,359.61 205.01,62.57 262.57,5 3197.13,5 cw(c3236.5,5) 3236.5,44.37 3354.61,44.37 3354.61,168.38 3240.44,168.38 cw(c3239.2,193.98) 3240.43,219.57 3354.61,219.56 3354.61,826.25 3236.5,826.25 cw(c3236.5,865.63) 3197.13,865.63 262.91,865.63 205.01,807.73 205.01,509.91 ; 205,509.94 225.9,509.94

## Text inside footprints (layer, text, board x,y; h text height)
JP1: Top Overlay "I-PEX" at 2723.66,559.14 h31.5 r90